# Altium PCB board_2.PcbDoc (part 3 of 4)
Units mm, origin at the board's own origin, x right, y up, seen from the top; angles counter-clockwise.
Board outline 144.25 x 129 mm, 8 copper layers (Top Layer, PWR, Layer2, Layer3, Layer4, Layer5, GND, Bottom Layer); 112 components, 273 nets, 1028 pads, 798 vias.
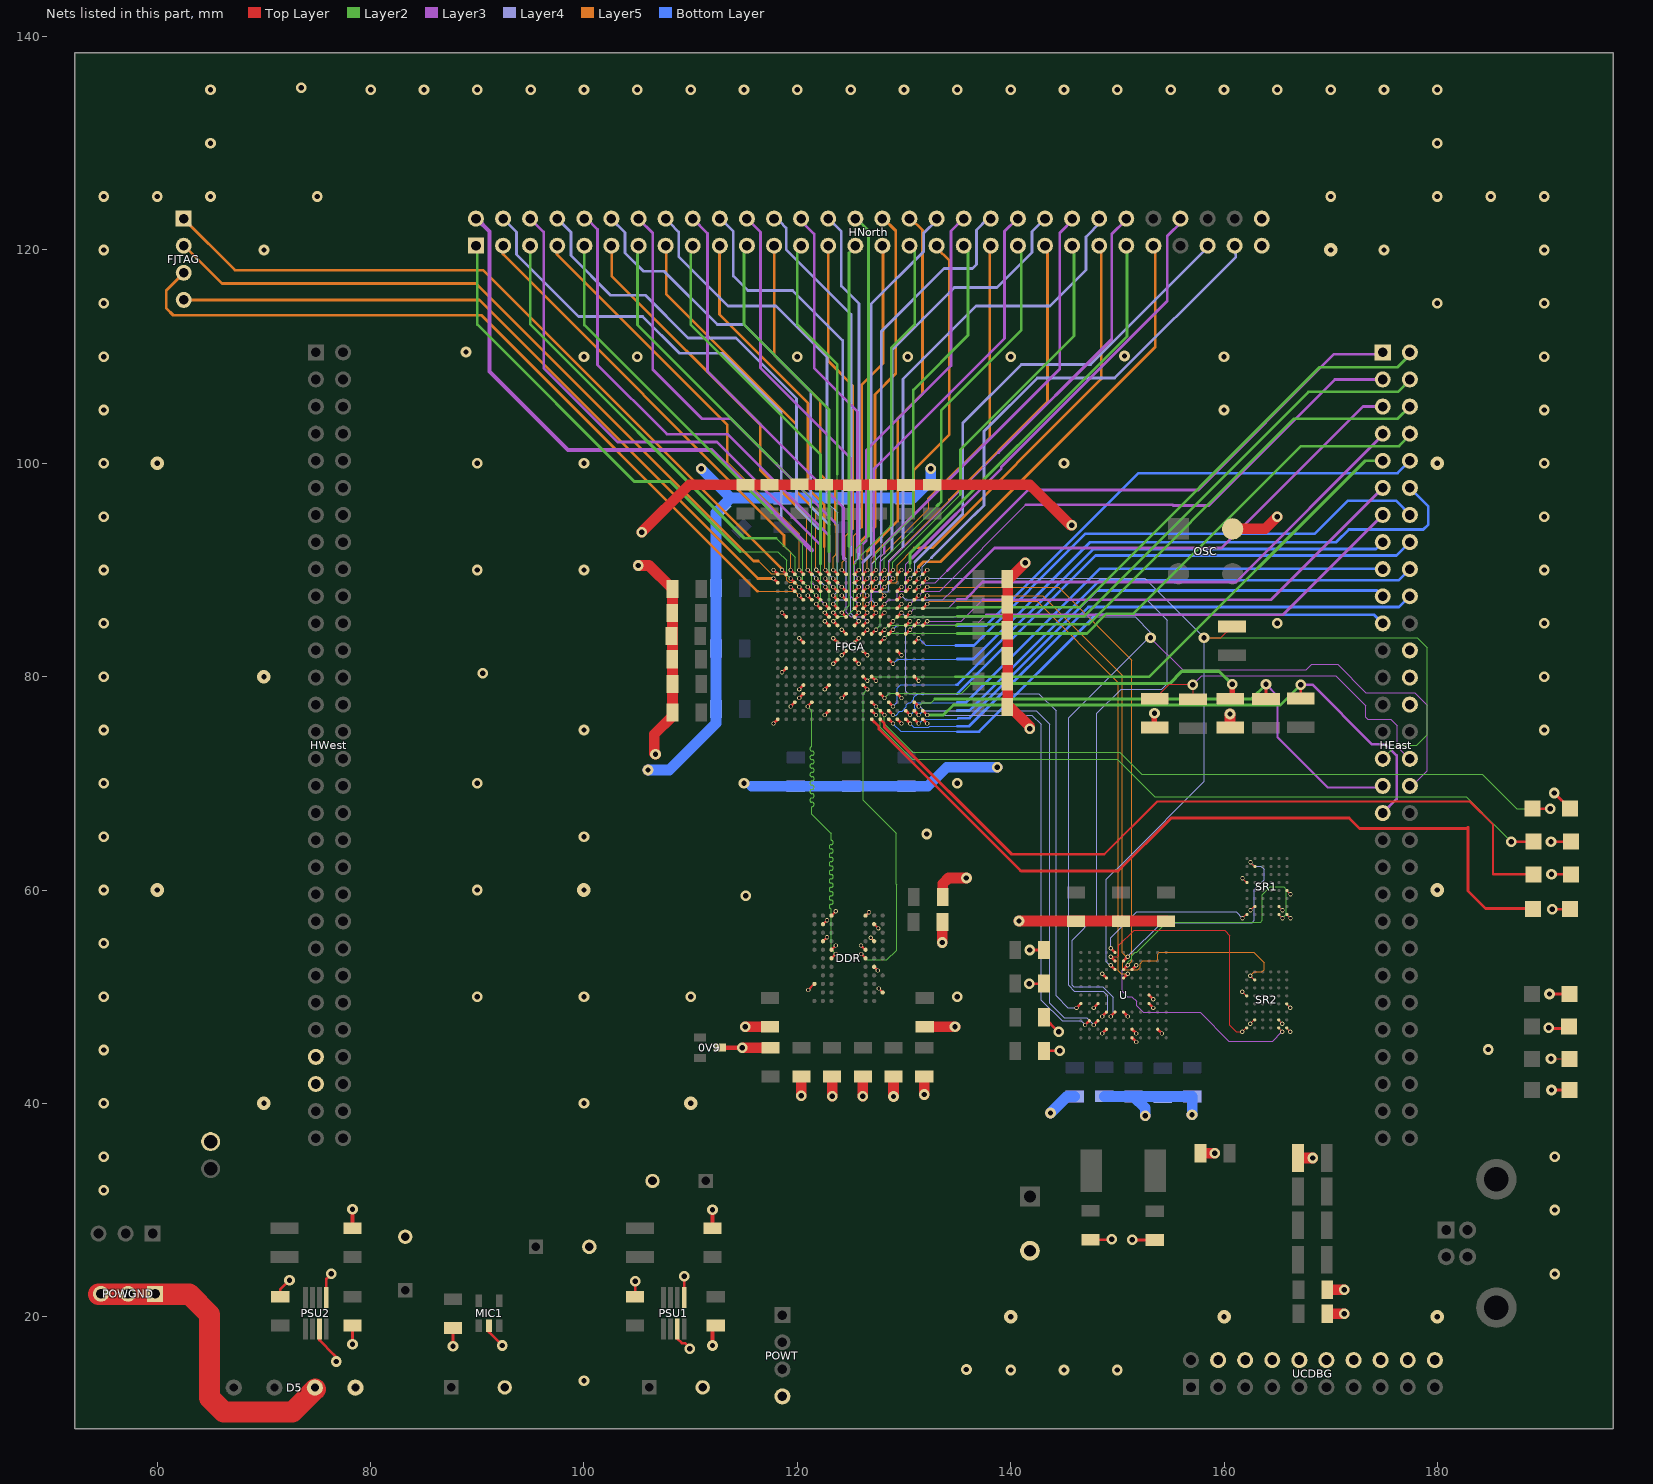
[diagram p9: the nets of this part, all layers, seen from the top]

## Via types
v1: diameter 0.4, hole 0.25, Top Layer to Bottom Layer, tented top, 553 vias
v2: diameter 1, hole 0.5, Top Layer to Bottom Layer, 222 vias
v3: diameter 1.27, hole 0.5, Top Layer to Bottom Layer, 12 vias
v4: diameter 0.4, hole 0.25, Top Layer to Bottom Layer, 7 vias
v5: diameter 7, hole 5, Top Layer to Bottom Layer, 4 vias

## Nets (pads, with @x,y where several pads share a name; then routed paths per layer and width w, separated by ;. In a path a pad name is that pad's centre, name@x,y a point inside that pad or via, vN(x,y) a via of type N, cw(c..) or ccw(c..) an arc to the next point about the centre after c; other vN are vias at no path point) (continued)
DDR2.DDR_RASN: DDR.F7 FPGA.L5 | length 30.9
  Top Layer w0.2: v1(126,54) DDR.F7@126.4,53.6
  Top Layer w0.254: FPGA.L5@126.168,79.204 v1(126.568,78.804)
  Layer2 w0.1: v1(126,54) 126.525,53.475 128.4,53.475 129.3,54.375 129.3,60.5 ; v1(126.568,78.804) 126.175,78.411 126.175,68.425 129.275,65.325 129.275,60.55 129.325,60.5
DDR2.DDR_WE: DDR.F3 FPGA.E3 | length 32.3
  Top Layer w0.2: DDR.F3@123.2,53.6 v1(123.6,54)
  Top Layer w0.254: v1(120.968,77.204) FPGA.E3@121.368,77.604
  Layer2 w0.1: v1@121,77.175 121.375,76.8 121.375,73.425 ccw(c121.375,73.225) 121.375,73.025 cw(c121.375,72.825) 121.375,72.625 ccw(c121.375,72.425) 121.375,72.225 cw(c121.375,72.025) 121.375,71.825 ccw(c121.375,71.625) 121.375,71.425 cw(c121.375,71.225) 121.375,71.025 ccw(c121.375,70.825) 121.375,70.625 cw(c121.375,70.425) 121.375,70.225 ccw(c121.375,70.025) 121.375,69.825 cw(c121.375,69.625) 121.375,69.425 ccw(c121.375,69.225) 121.375,69.025 cw(c121.375,68.825) 121.375,68.625 ccw(c121.375,68.425) 121.375,68.225 cw(c121.375,68.025) 121.375,67.825 121.375,67.1 123.15,65.325 ; 123.125,65.35 123.175,65.3 123.175,64.65 cw(c123.175,64.45) 123.175,64.25 ccw(c123.175,64.05) 123.175,63.85 cw(c123.175,63.65) 123.175,63.45 ccw(c123.175,63.25) 123.175,63.05 cw(c123.175,62.85) 123.175,62.65 ccw(c123.175,62.45) 123.175,62.25 cw(c123.175,62.05) 123.175,61.85 ccw(c123.175,61.65) 123.175,61.45 cw(c123.175,61.25) 123.175,61.05 ccw(c123.175,60.85) 123.175,60.65 cw(c123.175,60.45) 123.175,60.25 ccw(c123.175,60.05) 123.175,59.85 cw(c123.175,59.65) 123.175,59.45 ccw(c123.175,59.25) 123.175,59.05 cw(c123.175,58.85) 123.175,58.65 ccw(c123.175,58.45) 123.175,58.25 123.175,54.425 v1(123.6,54)
DDR_RZQ: FPGA.N4 R5.2 | length 36.1
  Top Layer w0.254: FPGA.N4@127.768,78.404 v1(128.168,78.004)
  Top Layer w0.5: R5.2@160.575,77.925 160.775,78.125 v2(160.775,79.275)
  Layer2 w0.1: v1@128.175,78 128.625,78.45 135.4,78.45 136.3,79.35
  Layer2 w0.254: 136.3,79.35 154.9,79.35
  Layer2 w0.3: 154.9,79.35 156.05,80.5 159.525,80.5 v2@160.75,79.275
EBI.READ: FPGA.V16 SR1.A2 SR2.A2 U.C6 | length 95.8
  Top Layer w0.1: SR2.A2@165.075,47.1 v1(165.45,46.725) ; SR1.A2@165.1,57.725 v1(165.475,57.35)
  Top Layer w0.254: FPGA.V16@131.768,88.004 v1(132.168,88.404) ; U.C6@150.575,52.55 v1(150.975,52.95)
  Layer3 w0.1: v1@151,52.95 150.925,52.95 150.45,52.475 150.45,50.5 150.944,50.006 151.369,50.006 151.8,49.575 151.8,49.15 152.425,48.525 157.75,48.525 160.45,45.825 164.55,45.825 165.425,46.7 v1@165.425,46.725
  Layer2 w0.1: v1(150.975,52.95) 150.975,53.225 151.325,53.575 151.325,53.825 151.675,54.175 151.825,54.175 154.625,56.975 163.425,56.975 163.6,57.15 163.6,59.575 164.325,60.3 165.575,60.3 165.85,60.025 165.85,57.725 v1(165.475,57.35)
  Layer5 w0.1: v1@132.15,88.386 144.489,88.386 151.35,81.525 151.35,53.325 v1(150.975,52.95)
EBI.SELECT0: FPGA.V14 U.D6 | length 50.3
  Top Layer w0.254: FPGA.V14@131.768,86.404 v1(132.168,86.804) ; U.D6@150.575,51.75 v1(150.975,52.15)
  Layer5 w0.1: v1(132.168,86.804) 132.414,87.05 142.475,87.05 150.1,79.425 150.1,52.425 150.375,52.15 v1(150.975,52.15)
EBI.SELECT1: SR1.A6 U.A5 | length 15.7
  Top Layer w0.1: v1(161.725,57.35) SR1.A6@162.1,57.725
  Top Layer w0.254: v1(149.375,54.55) U.A5@149.775,54.15
  Layer4 w0.1: v1@149.4,54.5 149.4,55.525 151.825,57.95 161.125,57.95 v1(161.725,57.35)
EBI.SELECT2: SR2.A6 U.B5 | length 23.8
  Top Layer w0.1: v1(149.375,53.75) 150.025,53.75 150.15,53.875 150.15,54.8 151.575,56.225 160.05,56.225 160.55,55.725 160.55,47.3 161.125,46.725 v1@161.675,46.725 ; v1(161.7,46.725) SR2.A6@162.075,47.1
  Top Layer w0.254: v1(149.375,53.75) U.B5@149.775,53.35
EBI.WRITE: FPGA.V15 SR1.G5 SR2.G5 U.B6 | length 88.6
  Top Layer w0.1: v1(162.45,51.975) SR2.G5@162.825,51.6 ; v1(162.475,62.6) SR1.G5@162.85,62.225
  Top Layer w0.254: FPGA.V15@131.768,87.204 v1(132.168,87.604) ; U.B6@150.575,53.35 v1(150.975,53.75)
  Layer5 w0.1: v1(132.168,87.604) 142.996,87.604 150.475,80.125 150.475,54.1 150.825,53.75 v1(150.975,53.75) 150.525,53.3 150.525,52.675 150.675,52.525 151.925,52.525 152.15,52.75 152.15,53.1 152.4,53.35 153.675,53.35 153.775,53.45 153.775,54 153.925,54.15 162.8,54.15 163.775,53.175 163.775,52.525 163.6,52.35 162.825,52.35 v1(162.45,51.975)
  Layer4 w0.1: v1(150.975,53.75) 150.975,53.775 154.15,56.95 162.625,56.95 162.825,57.15 162.825,60.025 163.75,60.95 163.75,61.95 163.45,62.25 162.825,62.25 v1(162.475,62.6)
FJTAG_TCK: FJTAG.4 FPGA.A17 | length 66.8
  Top Layer w0.254: v1(117.768,89.204) FPGA.A17@118.168,88.804
  Layer5 w0.254: FJTAG.4@62.35,115.3 90.2,115.3 116.296,89.204 v1(117.768,89.204)
FJTAG_TDI: FJTAG.3 FPGA.D15 | length 75
  Top Layer w0.254: v1(120.168,87.604) FPGA.D15@120.568,87.204
  Layer5 w0.1: 116.275,88 119.772,88 v1(120.168,87.604)
  Layer5 w0.254: FJTAG.3@62.484,117.856 60.85,116.222 60.85,114.525 61.5,113.875 90.4,113.875 116.275,88
FJTAG_TDO: FJTAG.2 FPGA.D16 | length 71.6
  Top Layer w0.254: v1(120.168,88.404) FPGA.D16@120.568,88.004
  Layer5 w0.1: 116.35,90.85 117.55,89.65 118.7,89.65 119.018,89.332 119.018,89.059 119.223,88.854 119.718,88.854 v1(120.168,88.404)
  Layer5 w0.254: FJTAG.2@62.525,120.4 66.075,116.85 89.9,116.85 115.9,90.85 116.35,90.85
FJTAG_TMS: FJTAG.1 FPGA.B18 | length 70.3
  Top Layer w0.254: v1(118.568,90.004) FPGA.B18@118.968,89.604
  Layer5 w0.254: FJTAG.1@62.484,122.936 62.484,122.891 67.275,118.1 90.556,118.1 v1@118.575,90.081
FLED0: F0.1 FPGA.N2 | length 68.8
  Top Layer w0.254: FPGA.N2@127.768,76.804 v1(128.168,76.404) ; F0.1@188.925,67.625 v2(190.575,67.625)
  Layer2 w0.1: v1(128.168,76.404) 128.168,75.582 130.825,72.925 ; 130.8,72.925 130.825,72.925 ; v2(190.575,67.625) 187.425,67.625 184.2,70.85 152.275,70.85 150.2,72.925 130.825,72.925
FLED1: F1.1 FPGA.N1 | length 74.2
  Top Layer w0.2: 140.1,63.35 148.775,63.35 153.725,68.3 183.05,68.3 185.225,66.125 185.225,61.575
  Top Layer w0.254: FPGA.N1@127.768,76.004 128.161,75.611 ; 128.15,75.6 128.15,75.3 140.1,63.35 ; 185.225,61.475 F1.1@189,61.475
FLED2: F2.1 FPGA.M3 | length 68.7
  Top Layer w0.254: FPGA.M3@127.011,77.561 v1(127.368,77.204) ; v2(186.925,64.525) F2.1@189,64.525
  Layer2 w0.1: v1(127.368,77.204) 127.775,76.797 127.775,75.25 130.762,72.262 149.988,72.262 153.525,68.725 182.725,68.725 v2@187,64.45
  Layer2 w0.254: v2@186.8,64.7 v2@187,64.5
FLED3: F3.1 FPGA.M1 | length 76.9
  Top Layer w0.254: FPGA.M1@126.968,76.004 127.642,75.33 127.642,75.09 140.907,61.825 ; 141,61.775 150.075,61.775 155.05,66.75 171.725,66.75 172.7,65.775 182.775,65.775 182.875,65.875 182.875,59.9 184.5,58.275 F3.1@188.825,58.275
FPGA_CCLK: FPGA.R15 HEast.32 R9.2 R10.2 U.H5 | length 107.3
  Top Layer w0.1: R9.2@153.425,77.925 R9.2@153.425,78.225 ; R9.2@153.5,77.925 154.85,79.275 v2@157.025,79.275 ; v2@157.05,79.25 157.1,79.2 R10.2@157.1,77.875
  Top Layer w0.254: FPGA.R15@129.368,87.204 v1(129.768,87.604) ; v1(149.375,48.15) U.H5@149.775,48.55
  Layer3 w0.1: v2(157.075,79.25) 157.9,80.075 170.45,80.075 173.275,77.25 173.275,76.2 173.475,76 175.625,76 176.25,75.375 176.25,73.425 HEast.32@177.4,72.275
  Layer4 w0.1: v1(129.768,87.604) 130.172,87.2 152.775,87.2 154.675,85.3 154.675,79.3 ; 148.05,76.525 148.075,76.55 ; v1@149.321,48.15 149.6,48.429 149.6,49.95 148.625,50.925 145.9,50.925 145.75,51.075 145.75,55.3 148.075,57.625 148.075,76.55 ; v2@157.025,79.3 154.65,79.3 154.175,78.825 150.35,78.825 148.075,76.55 ; v2@157.125,79.3 v2@157.15,79.275
FPGA_DIN: FPGA.R13 HEast.34 U.H4 | length 105
  Top Layer w0.254: FPGA.R13@129.368,85.604 v1(129.768,86.004) ; v1(148.575,48.15) U.H4@148.975,48.55
  Layer3 w0.1: v2(153.1,83.65) 156.125,80.625 167.7,80.625 168.225,81.15 170.65,81.15 173.3,78.5 177.875,78.5 179.05,77.325 179.05,71.175 177.625,69.75 HEast.34@177.425,69.75
  Layer4 w0.1: v1(129.768,86.004) 130.172,85.6 151.675,85.6 153.1,84.175 v2@153.1,83.8 ; v1(148.575,48.15) 149.1,48.675 149.1,50.1 148.675,50.525 145.975,50.525 145.45,51.05 145.45,76.15 152.95,83.65 v2(153.1,83.65)
FPGA_DONE: FPGA.V17 HEast.31 R6.2 U.C5 | length 101.7
  Top Layer w0.1: v2@158.1,83.65 158.125,83.625 159.675,83.625 R6.2@160.75,84.7
  Top Layer w0.254: FPGA.V17@131.768,88.804 v1(132.168,89.204) ; v1(149.375,52.95) U.C5@149.775,52.55
  Layer2 w0.1: v2(158.125,83.65) 178.125,83.65 179.05,82.725 179.05,74.575 178.05,73.575 176.125,73.575 HEast.31@174.85,72.3
  Layer4 w0.1: v1(132.168,89.204) 152.571,89.204 v2(158.125,83.65) 158.125,70.175 150.95,63 ; v1@149.299,52.95 148.975,53.274 148.975,61.024 150.95,62.999 ; 150.95,62.975 150.95,63
FPGA_INIT_B: FPGA.U3 HEast.33 R8.2 U.J3 | length 97.4
  Top Layer w0.254: FPGA.U3@130.968,77.604 v1@131.347,77.225 ; v1(147.775,47.35) U.J3@148.175,47.75 ; R8.2@163.925,77.9 v2(163.925,79.275)
  Layer3 w0.2: v2(163.925,79.275) 165.025,78.175 165.025,74.3 169.7,69.625 HEast.33@174.85,69.625
  Layer2 w0.1: v1@131.35,77.225 131.7,77.575 132.55,77.575 132.875,77.9
  Layer2 w0.254: 132.875,77.9 162.55,77.9 v2(163.925,79.275)
  Layer4 w0.1: v1(131.368,77.204) 131.496,77.204 131.875,76.825 142.375,76.825 143.65,75.55 143.65,49.4 145.025,48.025 147.125,48.025 v1@147.8,47.35
  Layer4 w0.254: HEast.33@174.8,69.8 HEast.33@174.9,69.7
FPGA_PROG_B: FPGA.V2 HEast.35 R7.2 U.J2 | length 98.3
  Top Layer w0.254: FPGA.V2@131.768,76.804 v1(132.168,76.404) ; v1(146.975,47.35) U.J2@147.375,47.75 ; R7.2@167.2,77.95 v2(167.2,79.25)
  Layer3 w0.254: v2@167.225,79.25 168.275,79.25 173.875,73.65 175.15,73.65 176.175,72.625 176.175,68.515 HEast.35@174.876,67.216
  Layer2 w0.254: v1(132.168,76.404) 133.679,76.404 134.625,77.35 165.3,77.35 v2(167.2,79.25)
  Layer4 w0.1: v1(132.168,76.404) 141.996,76.404 142.875,75.525 142.875,49.675 144.825,47.725 146.6,47.725 v1(146.975,47.35) ; HEast.35@174.8,67.216 HEast.35@174.876,67.216
FPGA_READY: FPGA.T12 U.G1 | length 52.1
  Top Layer w0.254: FPGA.T12@130.168,84.804 v1(130.568,85.204) ; v1(146.175,48.95) U.G1@146.575,49.35
  Layer3 w0.1: v1@146.075,48.95 v1(146.175,48.95)
  Layer4 w0.1: v1(130.568,85.204) 130.175,84.811 130.175,78.65 130.425,78.4 142.65,78.4 144.25,76.8 144.25,50.075 145.35,48.975 146.175,48.975 v1@146.225,48.925
  Bottom Layer w0.1: v1(146.175,48.95) v1@146.325,48.95
GND: 0V9.3 C1.1 C2.1 C3.1 C4.1 C5.1 C6.1 C7.1 C8.1 C9.1 C10.1 C11.1 C12.1 C13.1 C14.1 C15.1 C16.1 C17.1 C18.1 C19.1 C20.1 C21.1 C22.1 C23.1 C24.1 C25.1 C26.1 C27.1 C28.1 C29.1 C30.1 C31.1 C32.1 C33.1 C34.1 C35.1 C36.1 C37.1 C38.2 C39.2 C40.2 C41.2 C42.2 C43.1 C44.1 C45.1 C46.1 C47.1 C48.1 C49.1 C50.1 C51.1 C52.1 C53.2 C54.1 C55.1 C56.1 C57.1 C58.1 C59.1 C60.1 C61.1 C62.1 C63.1 C64.1 D1.2 D5.4 DDR.A3 DDR.A7 DDR.B2 DDR.B8 DDR.D2 DDR.D8 DDR.E3 DDR.E7 DDR.G8 DDR.J1 DDR.K9 F0.2 F1.2 F2.2 F3.2 FPGA.A1 FPGA.A18 FPGA.B7 FPGA.B13 FPGA.C3 FPGA.C16 FPGA.D4 FPGA.D5 FPGA.D10 FPGA.E15 FPGA.G2 FPGA.G5 FPGA.G12 FPGA.G17 FPGA.H8 FPGA.H10 FPGA.J4 FPGA.J9 FPGA.J11 FPGA.J15 FPGA.K8 FPGA.K10 FPGA.L9 FPGA.L11 FPGA.M2 FPGA.M6 FPGA.M17 FPGA.N13 FPGA.R1 FPGA.R4 FPGA.R9 FPGA.R14 FPGA.R16 FPGA.R18 FPGA.T16 FPGA.U6 FPGA.U12 FPGA.V1 FPGA.V18 HEast.24 HEast.26 HEast.28 HNorth.59 HNorth.60 HWest.53 HWest.55 L1.1 MIC1.2 OSC.2 POWT.4 PSU1.3 PSU1.5 PSU2.3 PSU2.5 R5.1 R9.1 SR1.A1 SR1.B2 SR1.B5 SR1.D1 SR1.E6 SR2.A1 SR2.B2 SR2.B5 SR2.D1 SR2.E6 U0.2 U1.2 U2.2 U3.2 U.C7 U.D4 U.F9 U.G3 U.G9 U.H6 U.K4 U.K7 U.K10 U.L7 U_RESET.2 UCDBG.4 UCDBG.6 UCDBG.8 UCDBG.10 UCDBG.12 UCDBG.14 UCDBG.16 UCDBG.18 UCDBG.20 UD.1 VI.2 VO.2 XC1.2 XC2.2 | length 315.9
  Top Layer w0.1: v1(161.7,50.475) SR2.E6@162.075,50.1 ; v1(161.725,61.1) SR1.E6@162.1,60.725 ; v1(162.45,47.475) SR2.B5@162.825,47.85 ; v1(162.475,58.1) SR1.B5@162.85,58.475 ; SR2.B2@165.075,47.85 v1(165.45,47.475) ; SR1.B2@165.1,58.475 v1(165.475,58.1) ; SR2.A1@165.825,47.1 v1(166.2,46.725) ; SR2.D1@165.825,49.35 v1(166.2,48.975) ; SR1.A1@165.85,57.725 v1(166.225,57.35) ; SR1.D1@165.85,59.975 v1(166.225,59.6) ; v2(190.65,44.175) 192.325,44.175 U2.2@192.35,44.2
  Top Layer w0.2: v1(121.025,50.625) DDR.J1@121.6,51.2 ; DDR.D2@122.4,55.2 v1(122.775,55.575) ; DDR.B2@122.4,56.8 v1(122.775,57.175) ; DDR.E3@123.2,54.4 v1(123.6,54.8) ; DDR.A3@123.2,57.6 v1(123.6,58) ; v1(125.975,54.8) DDR.E7@126.425,54.35 ; DDR.A7@126.4,57.6 v1(126.725,57.925) ; v1(126.875,55.525) DDR.D8@127.2,55.2 ; DDR.G8@127.2,52.8 v1(127.55,52.45) ; DDR.B8@127.2,56.8 v1(127.6,56.4) ; v1(127.625,50.775) DDR.K9@128,50.4
  Top Layer w0.254: C5.1@71.525,21.875 71.525,22.55 v2(72.4,23.425) ; PSU2.3@75.2,19.125 75.2,17.8 76.575,16.425 76.775,16.225 v2(76.775,15.8) ; PSU2.5@75.85,21.525 75.85,23.55 v2(76.325,24.025) ; v2(78.3,17.425) C4.1@78.3,19.175 ; v2(87.725,17.225) C7.1@87.725,18.95 ; MIC1.2@91.1,19.15 91.1,18.55 v2(92.35,17.3) ; C2.1@104.8,21.875 v2(104.8,23.325) ; PSU1.3@108.738,17.962 109.181,17.519 109.481,17.519 109.925,17.075 v2(109.925,17) ; PSU1.3@108.75,18.25 PSU1.3@108.75,19.125 ; PSU1.5@109.4,21.525 v2(109.4,23.8) ; v1(117.768,75.604) FPGA.A1@118.168,76.004 ; v1(117.768,90.004) FPGA.A18@118.168,89.604 ; v1(118.568,80.404) FPGA.B7@118.968,80.804 ; v1(118.568,86.004) FPGA.B13@118.968,85.604 ; v1(119.368,77.204) FPGA.C3@119.768,77.604 ; v1(119.368,88.404) FPGA.C16@119.768,88.004 ; v1(120.168,78.004) FPGA.D4@120.568,78.404 ; v1(120.168,78.804) FPGA.D5@120.568,79.204 ; v1(120.168,83.604) FPGA.D10@120.568,83.204 ; v1(120.968,87.604) FPGA.E15@121.368,87.204 ; v1(122.568,76.404) FPGA.G2@122.968,76.804 ; v1(122.568,78.804) FPGA.G5@122.968,79.204 ; v1(122.568,85.204) FPGA.G12@122.968,84.804 ; v1@122.568,89.204 FPGA.G17@122.968,88.804 ; v1(123.368,81.204) FPGA.H8@123.768,81.604 ; v1(123.368,83.604) FPGA.H10@123.768,83.204 ; v1(124.168,78.004) FPGA.J4@124.568,78.404 ; v1(124.168,82.004) FPGA.J9@124.568,82.404 ; v1(124.168,84.404) FPGA.J11@124.568,84.004 ; v1(124.168,87.604) FPGA.J15@124.568,87.204 ; FPGA.K8@125.368,81.604 v1(125.768,81.204) ; FPGA.K10@125.368,83.204 v1(125.768,83.604) ; FPGA.L9@126.168,82.404 v1(126.568,82.004) ; FPGA.L11@126.168,84.004 v1(126.568,84.404) ; FPGA.M2@126.968,76.804 v1(127.368,76.404) ; FPGA.M6@126.968,80.004 v1(127.368,79.604) ; FPGA.M17@126.968,88.804 v1(127.368,89.204) ; FPGA.N13@127.768,85.604 v1(128.168,86.004) ; FPGA.R1@129.368,76.004 v1(129.768,75.604) ; FPGA.R4@129.368,78.404 v1(129.768,78.004) ; FPGA.R9@129.368,82.404 v1(129.768,82.004) ; FPGA.R14@129.368,86.404 v1(129.768,86.804) ; FPGA.R16@129.368,88.004 v1(129.768,88.404) ; FPGA.R18@129.368,89.604 v1(129.768,90.004) ; FPGA.T16@130.168,88.004 v1(130.568,88.404) ; FPGA.U6@130.968,80.004 v1(131.368,79.604) ; FPGA.U12@130.968,84.804 v1(131.368,85.204) ; FPGA.V1@131.768,76.004 v1(132.168,75.604) ; FPGA.V18@131.768,89.604 v1(132.168,90.004) ; v2(141.75,51.225) C44.1@143.125,51.225 ; v2(141.8,54.375) C43.1@143.125,54.375 ; C46.1@143.125,44.925 v2(144.6,44.925) ; C45.1@143.125,48.075 v2(144.5,46.7) ; XC2.2@147.475,27.225 149.45,27.225 v2(149.475,27.25) ; v1(147.775,48.95) U.G3@148.175,49.35 ; v1(148.575,46.55) U.K4@148.975,46.95 ; v1(148.575,52.15) U.D4@148.975,51.75 ; U.H6@150.575,48.55 v1(150.975,48.15) ; U.L7@151.375,46.15 v1(151.775,45.75) ; U.K7@151.375,46.95 v1(151.775,46.55) ; U.C7@151.375,52.55 v1(151.775,52.95) ; v2(151.4,27.225) 151.425,27.2 XC1.2@153.5,27.2 ; U.G9@152.975,49.35 v1(153.375,48.95) ; U.F9@152.975,50.15 v1(153.375,49.75) ; U.K10@153.775,46.95 v1(154.175,46.55) ; v2(190.425,47.1) 190.225,47.1 190.15,47.025 U1.2@191.9,47.025 ; v2(190.5,50.25) U0.2@192.125,50.25 ; v2(190.65,64.525) F2.2@192.5,64.525 ; v2(190.697,41.247) U3.2@192.367,41.247 ; v2(190.7,61.475) F1.2@192.5,61.475 ; v2(190.775,58.2) F3.2@192.45,58.2 ; v2(190.95,69.1) F0.2@192.425,67.625
  Top Layer w0.4: C6.1@78.3,28.3 v2(78.3,30.075) ; v2(112.05,17.3) C1.1@112.05,19.175 ; C3.1@112.05,28.3 v2(112.05,30.025) ; 0V9.3@112.725,45.225 v2(114.85,45.225)
  Top Layer w0.5: R9.1@153.425,75.2 153.45,75.225 v2@153.45,76.575
  Top Layer w1: v2(105.1,90.425) 106.1,90.425 C30.1@108.3,88.225 C28.1@108.3,76.625 108.3,76.3 106.6,74.6 106.6,72.825 v2(106.7,72.725) ; v2(105.425,93.55) 109.875,98 C31.1@117.4,98 C35.1@122.483,98 C36.1@127.567,98 C37.1@132.65,98 141.8,98 145.6,94.2 v2(145.725,94.2) ; v2@115,45.225 C20.1@117.5,45.225 ; v2(115.125,47.175) C18.1@117.45,47.175 ; v2(120.38,40.705) C21.1@120.38,42.525 ; v2(123.26,40.66) C22.1@123.26,42.525 ; v2(126.14,40.665) C23.1@126.14,42.525 ; v2(129.02,40.645) C24.1@129.02,42.525 ; v2(131.9,40.825) C25.1@131.9,42.525 ; C19.1@131.95,47.175 v2(134.775,47.175) ; v2(133.6,55.075) C26.1@133.6,57 ; C27.1@133.625,59.35 133.625,60.575 134.175,61.125 v2(135.85,61.125) ; v2(140.775,57.1) C49.1@154.575,57.1 ; v2(141.375,90.675) 139.725,89.025 139.725,77.375 141.775,75.325 v2(141.775,75.125) ; UD.1@157.8,35.325 v2(159.125,35.325) ; R5.1@160.55,75.225 v2(160.55,76.5) ; OSC.2@160.805,93.85 163.85,93.85 v2(165,95) ; L1.1@166.925,34.875 v2(168.3,34.875) ; VI.2@169.675,20.275 v2(171.275,20.275) ; VO.2@169.675,22.525 v2(171.275,22.525)
  Layer2 w0.1: v1(165.45,47.475) v1@165.475,47.45
  Bottom Layer w1: v2(106,71.25) 108,71.25 112.375,75.625 C10.1@112.375,76.975 112.375,95.375 113.75,96.75 ; v2(111,99.5) 113.75,96.75 ; 115.725,69.725 C14.1@119.85,69.725 C15.1@125.05,69.725 C9.1@130.25,69.725 132.225,69.725 134,71.5 v2(138.75,71.5) ; v2(132.5,99.5) 132.5,98.375 130.875,96.75 113.75,96.75 ; v2(143.725,39.1) 145.275,40.65 C48.1@146,40.65 ; C63.1@148.775,40.65 C47.1@151.512,40.65 ; v2(152.6,38.85) 152.6,39.562 C47.1@151.512,40.65 ; v2(157,38.925) 157.025,38.95 C52.1@157.025,40.65 C47.1@151.512,40.65
  other v1: 122.631,89.204
  other v2: 100,14 140,15 145,15 150,15 135.85,15.05 191,24 191,30 55,31.85 55,35 191,35 55,40 100,40 55,45 184.775,45.05 55,50 90,50 100,50 110,50 135,50 55,55 115.175,59.45 55,60 90,60 55,65 100,65 132.125,65.25 55,70 90,70 115,70 135,70 55,75 100,75 190,75 153.475,76.575 55,80 190,80 90.525,80.325 55,85 165,85 190,85 55,90 90,90 100,90 190,90 55,95 190,95 55,100 90,100 100,100 145,100 190,100 55,105 160,105 190,105 55,110 100,110 105,110 120,110 130.35,110 140,110 160,110 190,110 150.675,110.05 88.95,110.425 55,115 180,115 190,115 55,120 70,120 175,120 190,120 55,125 60,125 65,125 75,125 170,125 180,125 185,125 190,125 65,130 180,130 65,135 80,135 85,135 90,135 95,135 100,135 105,135 110,135 115,135 120,135 125,135 130,135 135,135 140,135 145,135 150,135 155,135 160,135 165,135 170,135 175,135 180,135 73.5,135.2
  other v3: 140,20 160,20 180,20 70,40 110,40 60,60 100,60 180,60 70,80 60,100 180,100 170,120
GND_AC: D5.3 POWGND.1 POWGND.2 POWGND.3 | length 30.3
  Top Layer w2: POWGND.3@54.5,22.1 63.013,22.1 64.9,20.213 64.9,12.4 66.229,11.071 72.671,11.071 D5.3@74.8,13.2
HE2: FPGA.P8 HEast.12 | length 60.3
  Top Layer w0.254: FPGA.P8@128.568,81.604 v1(128.968,81.204)
  Bottom Layer w0.1: v1(128.968,81.204) 129.414,81.65 135,81.65
  Bottom Layer w0.254: 135,81.65 136.5,81.65 147.45,92.6 170.5,92.6 171.7,93.8 178.675,93.8 179.15,94.275 179.15,95.962 HEast.12@177.416,97.696
HE3: FPGA.U10 HEast.14 | length 53.1
  Top Layer w0.254: FPGA.U10@130.968,83.204 v1(131.368,83.604)
  Bottom Layer w0.1: v1(131.368,83.604) 132.047,82.925 134.825,82.925
  Bottom Layer w0.254: 134.825,82.925 136.55,82.925 147.025,93.4 168.513,93.4 171.588,96.475 176.15,96.475 HEast.14@177.45,95.175
HE4: FPGA.P11 HEast.10 | length 55.6
  Top Layer w0.254: FPGA.P11@128.568,84.004 v1(128.968,84.404)
  Bottom Layer w0.1: v1(128.968,84.404) 129.364,84.8 135,84.8
  Bottom Layer w0.254: 135,84.8 137.7,84.8 151.97,99.07 176.25,99.07 HEast.10@177.416,100.236
HE5: FPGA.N10 HEast.8 | length 57.9
  Top Layer w0.254: FPGA.N10@127.768,83.204 v1(128.168,83.604)
  Layer2 w0.1: v1(128.168,83.604) 128.614,84.05 135,84.05
  Layer2 w0.254: 135,84.05 147.15,84.05 149,85.9 151.525,85.9 167.225,101.6 176.4,101.6 HEast.8@177.6,102.8
HE6: FPGA.V12 HEast.11 | length 48.4
  Top Layer w0.254: FPGA.V12@131.768,84.804 v1(132.168,85.204)
  Layer3 w0.1: v1(132.168,85.204) 135.379,85.204 137.375,87.2
  Layer3 w0.254: 137.4,87.2 164.38,87.2 HEast.11@174.876,97.696
HE7: FPGA.T11 HEast.13 | length 49.3
  Top Layer w0.254: FPGA.T11@130.168,84.004 v1(130.568,84.404)
  Layer3 w0.1: v1(130.568,84.404) 131.014,84.85 136.775,84.85 137.725,85.8
  Layer3 w0.254: 137.725,85.8 165.52,85.8 HEast.13@174.876,95.156
HE8: FPGA.N11 HEast.6 | length 58.5
  Top Layer w0.254: FPGA.N11@127.768,84.004 v1(128.168,84.404)
  Layer2 w0.1: v1(128.168,84.404) 128.589,84.825 134.9,84.825
  Layer2 w0.254: 134.9,84.8 135.008,84.908 147.29,84.908 166.567,104.185 176.285,104.185 HEast.6@177.416,105.316
HE9: FPGA.M11 HEast.2 | length 62.2
  Top Layer w0.254: FPGA.M11@126.968,84.004 v1(127.368,84.404)
  Layer2 w0.1: v1(127.368,84.404) 127.775,84.811 127.775,86.2 128.025,86.45 135,86.45
  Layer2 w0.254: 135,86.45 135.05,86.5 146.45,86.5 168.95,109 176.25,109 HEast.2@177.5,110.25
HE10: FPGA.P12 HEast.4 | length 58.5
  Top Layer w0.254: FPGA.P12@128.568,84.804 v1(128.968,85.204)
  Layer2 w0.1: v1(128.968,85.204) 129.368,85.604 134.679,85.604 134.725,85.65 135,85.65
  Layer2 w0.254: 135,85.65 146.875,85.65 167.925,106.7 176.3,106.7 HEast.4@177.5,107.9
HE11: FPGA.T14 HEast.5 | length 52.5
  Top Layer w0.254: FPGA.T14@130.168,86.404 v1(130.568,86.804)
  Layer3 w0.1: v1(130.568,86.804) 130.964,87.2 133.641,87.2 134.602,88.16
  Layer3 w0.254: 134.602,88.16 138.491,92.05 159.75,92.05 173.016,105.316 HEast.5@174.876,105.316
HE12: FPGA.U15 HEast.3 | length 52.5
  Top Layer w0.254: FPGA.U15@130.968,87.204 v1(131.368,87.604)
  Layer3 w0.1: v1(131.368,87.604) 131.789,88.025 133.34,88.025 141.415,96.1
  Layer3 w0.254: 141.415,96.1 155.168,96.1 155.218,96.05 158.575,96.05 170.381,107.856 HEast.3@174.876,107.856
HE13: FPGA.T13 HEast.7 | length 51.9
  Top Layer w0.254: FPGA.T13@130.168,85.604 v1(130.568,86.004)
  Layer3 w0.1: v1(130.568,86.004) 131.014,86.45 134.2,86.45 135,87.25
  Layer3 w0.254: 135,87.25 135.75,87.25 137.375,88.875 161.1,88.875 174.876,102.651 HEast.7@174.876,102.776
HE14: FPGA.U16 HEast.1 | length 53.3
  Top Layer w0.254: FPGA.U16@130.968,88.004 v1(131.368,88.404)
  Layer3 w0.1: v1(131.368,88.404) 131.764,88.8 132.935,88.8 134.085,89.95
  Layer3 w0.254: 134.085,89.95 141.635,97.5 157.6,97.5 170.325,110.225 HEast.1@175.1,110.225
HE15: FPGA.P3 HEast.15 | length 53.6
  Top Layer w0.254: FPGA.P3@128.568,77.604 v1(128.968,77.204)
  Bottom Layer w0.1: v1(128.968,77.204) 129.368,77.604 129.368,78.918 129.7,79.25 134.925,79.25
  Bottom Layer w0.254: 134.925,79.25 135.034,79.25 147.759,91.975 174.235,91.975 HEast.15@174.822,92.562
HE16: FPGA.L6 HEast.9 | length 57.4
  Top Layer w0.254: FPGA.L6@126.168,80.004 v1(126.568,79.604)
  Layer2 w0.1: v1(126.568,79.604) 126.964,80 134.8,80
  Layer2 w0.254: 134.8,80 153,80 173.236,100.236 HEast.9@174.876,100.236
HE17: FPGA.U2 HEast.18 | length 52.3
  Top Layer w0.254: FPGA.U2@130.968,76.804 v1(131.368,76.404)
  Bottom Layer w0.1: v1(131.368,76.404) 131.789,76.825 135,76.825
  Bottom Layer w0.254: 135,76.825 136.14,76.825 148.34,89.025 176.365,89.025 HEast.18@177.416,90.076
HE18: FPGA.U1 HEast.19 | length 49.4
  Top Layer w0.254: FPGA.U1@130.968,76.004 v1(131.368,75.604)
  Bottom Layer w0.1: v1(131.368,75.604) 131.789,76.025 135.082,76.025
  Bottom Layer w0.254: 135.082,76.107 136.14,76.107 148.108,88.075 174.337,88.075 HEast.19@174.876,87.536
HE19: FPGA.T2 HEast.17 | length 51
  Top Layer w0.254: FPGA.T2@130.168,76.804 v1(130.568,76.404)
  Bottom Layer w0.1: v1(130.568,76.404) 131.12,76.957 131.018,77.059 131.018,77.349 131.223,77.554 131.513,77.554 131.615,77.451 131.739,77.575 135,77.575
  Bottom Layer w0.254: 135,77.575 135.825,77.575 148.375,90.125 174.827,90.125 HEast.17@174.876,90.076
HE20: FPGA.T1 HEast.20 | length 52.6
  Top Layer w0.254: FPGA.T1@130.168,76.004 v1(130.572,75.6)
  Bottom Layer w0.1: v1(130.572,75.6) 130.922,75.25 132.309,75.25 132.409,75.35 135,75.35
  Bottom Layer w0.254: 135,75.35 136.102,75.35 147.277,86.525 176.405,86.525 HEast.20@177.416,87.536
HE21: FPGA.P2 HEast.16 | length 56
  Top Layer w0.254: FPGA.P2@128.568,76.804 v1(128.968,76.404)
  Bottom Layer w0.1: v1(128.968,76.404) 129.273,76.404 129.623,76.754 129.813,76.754 130.218,77.159 130.218,77.349 130.423,77.554 130.613,77.554 130.918,77.859 130.918,78.049 131.269,78.4 135,78.4
  Bottom Layer w0.254: 135,78.4 147.95,91.35 176.15,91.35 HEast.16@177.416,92.616
HE22: FPGA.P1 HEast.21 | length 51.6
  Top Layer w0.254: FPGA.P1@128.568,76.004 v1(128.968,75.604)
  Bottom Layer w0.1: v1(128.968,75.604) 129.676,74.896 135,74.896
  Bottom Layer w0.254: 135,74.842 137.041,74.842 147.999,85.8 174.072,85.8 HEast.21@174.876,84.996
HEADERS.HN0: FPGA.F15 HNorth.13 | length 40.2
  Top Layer w0.254: v1(121.768,87.604) FPGA.F15@122.168,87.204
  Layer2 w0.1: 118,100 121.35,96.65 121.35,91.521 121.352,91.519 121.352,90.151 121.352,88.02 v1(121.768,87.604)
  Layer2 w0.254: HNorth.13@105.025,120.325 105.025,112.975 118,100
HEADERS.HN1: FPGA.F16 HNorth.2 | length 56.1
  Top Layer w0.254: v1(121.768,88.404) FPGA.F16@122.168,88.004
  Layer3 w0.1: 121.35,91.85 121.35,88.822 v1(121.768,88.404)
  Layer3 w0.4: HNorth.2@89.95,122.925 91.15,121.725 91.15,108.6 98.5,101.25 111.95,101.25 121.35,91.85
HEADERS.HN2: FPGA.C17 HNorth.1 | length 48
  Top Layer w0.254: v1(119.368,89.204) FPGA.C17@119.768,88.804
  Layer2 w0.1: 114.65,91.725 118.175,91.725 119,90.9 119,89.572 v1(119.368,89.204)
  Layer2 w0.254: HNorth.1@89.85,120.325 90,120.175 90,113 104.713,98.287 108.088,98.287 114.65,91.725
HEADERS.HN3: FPGA.C18 HNorth.3 | length 42.1
  Top Layer w0.254: v1(119.368,90.004) FPGA.C18@119.768,89.604
  Layer5 w0.1: 118.75,92.275 119.368,91.657 v1(119.368,90.004)
  Layer5 w0.254: HNorth.3@92.4,120.375 92.4,119.6 118.75,93.25 118.75,92.275
HEADERS.HN4: FPGA.F14 HNorth.17 | length 39.5
  Top Layer w0.254: v1(121.768,86.804) FPGA.F14@122.168,86.404
  Layer2 w0.1: v1(121.768,86.804) 122.175,87.211 122.175,90.55
  Layer2 w0.254: HNorth.17@110.25,120.375 110,120.125 110,113 122.175,100.825 122.175,90.55
HEADERS.HN5: FPGA.G14 HNorth.6 | length 53.5
  Top Layer w0.254: v1(122.568,86.804) FPGA.G14@122.968,86.404
  Layer3 w0.1: 122.2,92.275 122.2,87.172 v1(122.568,86.804)
  Layer3 w0.254: HNorth.6@95.05,122.85 96.225,121.675 96.225,108.925 103.15,102 112.475,102 122.2,92.275
HEADERS.HN6: FPGA.D17 HNorth.5 | length 44
  Top Layer w0.254: v1(120.168,89.204) FPGA.D17@120.568,88.804
  Layer2 w0.1: 118.025,92.975 119.8,91.2 119.8,90.7 ; 119.8,90.625 119.8,90.7 ; v1(120.168,89.204) 119.8,89.572 119.8,90.7
  Layer2 w0.254: HNorth.5@94.975,120.325 94.975,113.025 115.025,92.975 118.025,92.975
HEADERS.HN7: FPGA.D18 HNorth.7 | length 40.4
  Top Layer w0.254: v1(120.168,90.004) FPGA.D18@120.568,89.604
  Layer5 w0.1: 113.425,100.15 120.168,93.407 v1(120.168,90.004)
  Layer5 w0.254: HNorth.7@97.475,120.425 97.475,119.575 113.425,103.625 113.425,100.15
HEADERS.HN8: FPGA.H12 HNorth.30 | length 40.4
  Top Layer w0.254: v1(123.368,85.204) FPGA.H12@123.768,84.804
  Layer2 w0.1: v1(123.368,85.204) 123.429,85.204 123.875,85.65 124.625,85.65 125.275,86.3 125.275,90.45 125.5,90.675 125.5,91.975 126.675,93.15
  Layer2 w0.254: HNorth.30@125.675,122.8 126.675,121.8 126.675,93.15
HEADERS.HN9: FPGA.G13 HNorth.21 | length 38.5
  Top Layer w0.254: v1(122.568,86.004) FPGA.G13@122.968,85.604
  Layer2 w0.1: v1(122.568,86.004) 123,86.436 123,89.843 122.985,89.858 122.985,91.59
  Layer2 w0.254: HNorth.21@115.3,120.4 115,120.1 115,113 122.975,105.025 122.975,91.7
HEADERS.HN10: FPGA.E16 HNorth.9 | length 41.2
  Top Layer w0.254: v1(120.968,88.404) FPGA.E16@121.368,88.004
  Layer2 w0.1: 117.625,95.375 120.527,92.473 120.527,88.845 v1(120.968,88.404)
  Layer2 w0.254: HNorth.9@100.036,120.396 100.036,112.964 117.625,95.375
HEADERS.HN11: FPGA.E18 HNorth.11 | length 38.6
  Top Layer w0.254: v1(120.968,90.004) FPGA.E18@121.368,89.604
  Layer5 w0.1: 120.881,95.019 120.881,90.091 v1(120.968,90.004)
  Layer5 w0.254: HNorth.11@102.6,120.425 102.6,117.575 116.525,103.65 116.525,99.375 120.881,95.019
HEADERS.HN12: FPGA.K12 HNorth.24 | length 41.1
  Top Layer w0.254: FPGA.K12@125.368,84.804 v1(125.768,85.204)
  Layer4 w0.1: 125.075,91.375 125.025,91.325 125.025,85.947 v1(125.768,85.204)
  Layer4 w0.254: HNorth.24@118.375,122.65 118.95,122.075 118.95,120.05 125.05,113.95 125.05,91.4
HEADERS.HN13: FPGA.K13 HNorth.31 | length 36.6
  Top Layer w0.254: FPGA.K13@125.368,85.604 v1(125.768,86.004)
  Layer2 w0.254: HNorth.31@127.85,120.275 HNorth.31@128.075,120.275
  Layer5 w0.1: v1(125.768,86.004) 125.275,86.497 125.275,93.225 126.05,94
  Layer5 w0.254: 126.05,94 126.05,107.375 128.025,109.35 HNorth.31@128.025,120.5
HEADERS.HN14: FPGA.F17 HNorth.4 | length 52.3
  Top Layer w0.254: v1(121.768,89.204) FPGA.F17@122.168,88.804
  Layer4 w0.1: 119.85,93.35 121.35,91.85 121.35,89.622 v1(121.768,89.204)
  Layer4 w0.254: HNorth.4@92.416,122.936 93.675,121.677 93.675,119.575 99.5,113.75 105.5,113.75 108.937,110.312 112.937,110.312 118.5,104.75 118.5,94.7 119.85,93.35
HEADERS.HN15: FPGA.F18 HNorth.15 | length 36.7
  Top Layer w0.254: v1@121.768,90.004 FPGA.F18@122.168,89.604
  Layer5 w0.1: 121.706,95.594 121.706,90.094 v1(121.775,90.025)
  Layer5 w0.254: HNorth.15@107.7,120.35 107.7,115.875 119.928,103.647 119.928,97.372 121.706,95.594
HEADERS.HN16: FPGA.H13 HNorth.25 | length 36.8
  Top Layer w0.254: v1(123.368,86.004) FPGA.H13@123.768,85.604
  Layer2 w0.1: v1(123.368,86.004) 123.75,86.386 123.75,98.962
  Layer2 w0.254: HNorth.25@120.375,120.325 120,119.95 120,113 123.75,109.25 123.75,98.962
HEADERS.HN17: FPGA.H14 HNorth.20 | length 44.9
  Top Layer w0.254: v1(123.368,86.804) FPGA.H14@123.768,86.404
  Layer4 w0.1: v1@123.35,86.85 123.7,87.2 124.45,87.2 124.6,87.35 124.6,91.05 124.25,91.4
  Layer4 w0.254: HNorth.20@112.825,122.9 114,121.725 114,117.55 115.363,116.187 119.563,116.187 124.25,111.5 124.25,91.425
HEADERS.HN18: FPGA.H15 HNorth.16 | length 44.8
  Top Layer w0.254: v1(123.368,87.604) FPGA.H15@123.768,87.204
  Layer4 w0.1: 122.775,96.35 123.775,95.35 123.775,91.3 123.775,88.011 v1(123.368,87.604)
  Layer4 w0.254: HNorth.16@108.05,122.525 108.875,121.7 108.875,119.375 113.5,114.75 118,114.75 122.775,109.975 122.775,96.35
HEADERS.HN19: FPGA.H16 HNorth.10 | length 48.1
  Top Layer w0.254: v1(123.368,88.404) FPGA.H16@123.768,88.004
  Layer3 w0.1: 123,90.775 123,88.772 v1(123.368,88.404)
  Layer3 w0.254: HNorth.10@100.175,123.025 101.275,121.925 101.275,109.225 107.775,102.725 113.45,102.725 123,93.175 123,90.775
HEADERS.HN20: FPGA.G16 HNorth.8 | length 50.1
  Top Layer w0.254: v1@122.568,88.404 FPGA.G16@122.968,88.004
  Layer4 w0.1: 122.025,93.9 122.2,93.725 122.2,88.898 122.631,88.467 v1(122.631,88.404)
  Layer4 w0.254: HNorth.8@97.496,122.936 98.775,121.657 98.775,119.475 102.5,115.75 105.75,115.75 109.75,111.75 114.25,111.75 119.928,106.072 119.928,95.897 121.975,93.85
HEADERS.HN21: FPGA.G18 HNorth.19 | length 35.1
  Top Layer w0.254: v1@122.568,90.004 FPGA.G18@122.968,89.604 ; v1@122.568,90.004 v1(122.631,90.004)
  Layer5 w0.1: 122.568,92.25 122.568,90.067 v1(122.631,90.004)
  Layer5 w0.254: HNorth.19@112.7,120.325 112.7,113.95 120.999,105.651 120.999,97.629 122.528,96.1 122.528,92.172
HEADERS.HN22: FPGA.J13 HNorth.29 | length 35.5
  Top Layer w0.254: v1(124.168,86.004) FPGA.J13@124.568,85.604
  Layer2 w0.1: v1(124.168,86.004) 124.847,86.683 124.847,92.222
  Layer2 w0.254: 124.847,92.222 124.847,119.722 HNorth.29@125.525,120.4
HEADERS.HN23: FPGA.K14 HNorth.22 | length 41.2
  Top Layer w0.254: FPGA.K14@125.368,86.404 v1(125.768,86.804)
  Layer3 w0.1: 124.975,92.45 124.975,87.597 v1(125.768,86.804)
  Layer3 w0.254: HNorth.22@115.276,122.936 116.55,121.662 116.55,108.95 125,100.5 125,92.35
HEADERS.HN24: FPGA.L12 HNorth.18 | length 45.7
  Top Layer w0.254: FPGA.L12@126.168,84.804 v1(126.568,85.204)
  Layer3 w0.1: 124.325,91.025 124.6,90.75 124.6,86.05 125.025,85.625 126.147,85.625 v1(126.568,85.204)
  Layer3 w0.254: HNorth.18@110.196,122.936 111.573,121.559 111.573,108.602 124.325,95.85 124.325,91.025
HEADERS.HN25: FPGA.L13 HNorth.32 | length 39.6
  Top Layer w0.254: FPGA.L13@126.168,85.604 v1(126.568,86.004)
  Layer5 w0.1: 126,92.75 126,91.05 126.175,90.875 126.175,86.397 v1(126.568,86.004)
  Layer5 w0.254: 126,92.75 127.275,94.025 127.275,106.45 129.225,108.4 129.225,121.8 HNorth.32@128.025,123
HEADERS.HN26: FPGA.K15 HNorth.38 | length 40
  Top Layer w0.254: FPGA.K15@125.368,87.204 v1(125.768,87.604)
  Layer3 w0.1: v1@125.775,87.6 126.2,88.025 126.2,92.475
  Layer3 w0.254: 126.2,92.475 126.45,92.725 126.45,101.2 134.4,109.15 134.4,121.775 HNorth.38@135.6,122.975
HEADERS.HN27: FPGA.K16 HNorth.28 | length 36.6
  Top Layer w0.254: FPGA.K16@125.368,88.004 v1(125.768,88.404)
  Layer4 w0.1: v1(125.768,88.404) 125.4,88.772 125.4,90.725 125.775,91.1
  Layer4 w0.254: HNorth.28@122.896,122.936 124.125,121.707 124.125,116.625 125.775,114.975 125.775,91.1
HEADERS.HN28: FPGA.L15 HNorth.36 | length 38.9
  Top Layer w0.254: FPGA.L15@126.168,87.204 v1(126.568,87.604)
  Layer4 w0.1: 126.125,90.675 126.125,88.047 v1(126.568,87.604)
  Layer4 w0.254: 126.125,90.675 126.925,91.475 126.925,114.925 131.85,119.85 131.85,121.575 HNorth.36@133.1,122.825
HEADERS.HN29: FPGA.L16 HNorth.42 | length 40.8
  Top Layer w0.254: FPGA.L16@126.168,88.004 v1(126.568,88.404)
  Layer3 w0.1: v1(126.568,88.404) 126.95,88.786 126.95,91.1 ; 126.975,91.125 127.175,91.325 127.175,91.375
  Layer3 w0.254: 127.175,91.375 127.175,99.45 139.425,111.7 139.425,121.75 HNorth.42@140.575,122.9
HEADERS.HN30: FPGA.H17 HNorth.12 | length 45.5
  Top Layer w0.254: v1(123.368,89.204) FPGA.H17@123.768,88.804
  Layer4 w0.1: 123,94.225 123,89.572 v1(123.368,89.204)
  Layer4 w0.254: HNorth.12@102.558,122.917 103.85,121.625 103.85,119.725 105.575,118 107.5,118 112.5,113 115,113 121.25,106.75 121.25,95.975 123,94.225
HEADERS.HN31: FPGA.H18 HNorth.23 | length 33.5
  Top Layer w0.254: v1(123.368,90.004) FPGA.H18@123.768,89.604
  Layer5 w0.1: v1(123.368,90.004) 123.368,91.193 123.675,91.5
  Layer5 w0.254: HNorth.23@117.825,120.375 117.825,110.175 122.142,105.858 122.142,98.983 123.544,97.581 123.544,94.304 123.708,94.14 123.708,91.533 123.675,91.5
HEADERS.HN32: FPGA.J16 HNorth.14 | length 44.5
  Top Layer w0.254: v1(124.168,88.404) FPGA.J16@124.568,88.004
  Layer3 w0.1: 123.75,90.8 123.75,88.822 v1(124.168,88.404)
  Layer3 w0.254: HNorth.14@105.175,122.85 106.45,121.575 106.45,108.8 111.075,104.175 113.8,104.175 123.75,94.225 123.75,90.8
HEADERS.HN33: FPGA.J18 HNorth.27 | length 32.3
  Top Layer w0.254: v1(124.168,90.004) FPGA.J18@124.568,89.604
  Layer5 w0.1: v1(124.168,90.004) 124.229,90.065 124.229,90.728 124.493,90.992 124.493,93.168 125.2,93.875 125.175,93.875
  Layer5 w0.254: HNorth.27@122.9,120.35 122.9,109.575 125.175,107.3 125.175,93.875
HEADERS.HN34: FPGA.K17 HNorth.26 | length 36.7
  Top Layer w0.254: FPGA.K17@125.368,88.804 v1(125.768,89.204)
  Layer3 w0.1: 125.65,91.65 125.65,91.1 125.375,90.825 125.375,89.597 v1(125.768,89.204)
  Layer3 w0.254: HNorth.26@120.25,122.825 121.575,121.5 121.575,108.925 125.65,104.85 125.65,91.65
HEADERS.HN35: FPGA.K18 HNorth.33 | length 33.3
  Top Layer w0.254: FPGA.K18@125.368,89.604 v1(125.768,90.004)
  Layer2 w0.1: v1(125.768,90.004) 125.909,90.145 125.909,91.284 128.803,94.178
  Layer2 w0.254: 128.785,94.167 128.8,94.182 128.8,110.8 131,113 131,120.025 HNorth.33@130.6,120.425
HEADERS.HN36: FPGA.L17 HNorth.40 | length 40.7
  Top Layer w0.254: FPGA.L17@126.168,88.804 v1(126.568,89.204)
  Layer4 w0.1: v1(126.568,89.204) 127,89.636 127,90.575 127.875,91.45 127.875,92.625 ; 127.775,94.6 127.775,94.725
  Layer4 w0.254: 127.875,92.625 127.875,112.375 133.75,118.25 136.4,118.25 136.8,118.65 136.8,121.875 HNorth.40@137.85,122.925
  Bottom Layer w0.1: v1@126.575,89.2 v1@126.6,89.2
HEADERS.HN37: FPGA.L18 HNorth.34 | length 36
  Top Layer w0.254: FPGA.L18@126.168,89.604 v1(126.568,90.004)
  Layer5 w0.1: v1(126.568,90.004) 126.568,91.657 126.575,91.664
  Layer5 w0.254: 126.568,91.743 129.4,94.575 129.4,104.2 131.725,106.525 131.725,121.85 HNorth.34@130.625,122.95
HEADERS.HN38: FPGA.M16 HNorth.44 | length 44
  Top Layer w0.254: FPGA.M16@126.968,88.004 v1(127.368,88.404)
  Layer4 w0.1: v1(127.368,88.404) 127.775,88.811 127.775,90.75 128.875,91.85
  Layer4 w0.254: 128.875,91.85 128.875,110.625 134.719,116.469 138.719,116.469 142,119.75 142,121.72 HNorth.44@143.216,122.936
HEADERS.HN39: FPGA.M18 HNorth.37 | length 34.8
  Top Layer w0.254: FPGA.M18@126.968,89.604 v1(127.368,90.004)
  Layer2 w0.1: v1(127.368,90.004) 127.368,91.518 130.875,95.025
  Layer2 w0.254: 130.875,95.025 130.875,106.875 136,112 136,120.075 HNorth.37@135.575,120.5
HEADERS.HN40: FPGA.N17 HNorth.43 | length 38.2
  Top Layer w0.254: FPGA.N17@127.768,88.804 v1(128.168,89.204)
  Layer5 w0.1: v1(128.168,89.204) 128.6,89.636 128.6,90.895 134.25,96.545
  Layer5 w0.254: 134.25,96.545 134.25,96.575 143.45,105.775 HNorth.43@143.45,120.5
HEADERS.HN41: FPGA.N18 HNorth.41 | length 36.5
  Top Layer w0.254: FPGA.N18@127.768,89.604 v1(128.168,90.004)
  Layer2 w0.1: v1(128.168,90.004) 128.168,91.074 133.069,95.975
  Layer2 w0.254: 133.069,95.975 133.5,96.406 133.5,104.975 141,112.475 141,120.1 HNorth.41@140.65,120.45
HEADERS.HN42: FPGA.P17 HNorth.50 | length 43.6
  Top Layer w0.254: FPGA.P17@128.568,88.804 v1(128.968,89.204)
  Layer3 w0.1: v1(128.968,89.204) 128.55,89.622 128.55,90.725 138.825,101
  Layer3 w0.254: 138.825,101 138.85,101 149.475,111.625 149.475,121.475 HNorth.50@150.825,122.825
  Layer4 w0.1: v1@128.946,89.204 v1(128.968,89.204)
HEADERS.HN43: FPGA.P18 HNorth.45 | length 37.9
  Top Layer w0.254: FPGA.P18@128.568,89.604 v1(128.968,90.004)
  Layer2 w0.1: v1(128.968,90.004) 128.968,90.743 135.3,97.075
  Layer2 w0.254: 135.3,97.075 135.3,101.3 145.925,111.925 HNorth.45@145.925,120.325
HEADERS.HN44: FPGA.N15 HNorth.39 | length 37.6
  Top Layer w0.254: FPGA.N15@127.768,87.204 v1(128.168,87.604)
  Layer5 w0.1: v1(128.168,87.604) 127.8,87.972 127.8,91.227 132.3,95.727 132.3,96.675
  Layer5 w0.254: 132.3,96.675 138.05,102.425 HNorth.39@138.05,120.275
HEADERS.HN45: FPGA.N16 HNorth.47 | length 42.4
  Top Layer w0.254: FPGA.N16@127.768,88.004 v1(128.168,88.404)
  Layer5 w0.1: v1(128.168,88.404) 128.575,88.811 129.261,88.811 129.35,88.9 129.35,90.45 130.975,92.075
  Layer5 w0.254: 130.975,92.075 132.675,92.075 148.481,107.881 148.481,120.294 HNorth.47@148.375,120.4
HEADERS.HN46: FPGA.T17 HNorth.55 | length 47.2
  Top Layer w0.254: FPGA.T17@130.168,88.804 v1(130.568,89.204)
  Layer4 w0.1: v1(130.568,89.204) 131,89.636 131,90.725
  Layer4 w0.254: 131,90.725 135.5,95.225 135.5,103.75 141,109.25 147.5,109.25 158.375,120.125 158.375,120.4 HNorth.55@158.325,120.45
HEADERS.HN47: FPGA.T18 HNorth.49 | length 39.4
  Top Layer w0.254: FPGA.T18@130.168,89.604 v1(130.568,90.004)
  Layer2 w0.1: v1(130.568,90.004) 130.568,90.618
  Layer2 w0.254: 130.568,90.618 130.568,91.568 150.9,111.9 HNorth.49@150.9,120.4
HEADERS.HN48: FPGA.U17 HNorth.57 | length 48.1
  Top Layer w0.254: FPGA.U17@130.968,88.804 v1(131.368,89.204)
  Layer4 w0.1: v1@131.375,89.225 131.725,89.575 131.725,90.3 132.575,91.15
  Layer4 w0.254: 132.575,91.15 136.567,95.142 136.585,95.142 137.5,96.057 137.5,103 142.5,108 149.75,108 161.1,119.35 161.1,119.625 161.075,119.65 HNorth.57@161.075,120.175
HEADERS.HN49: FPGA.U18 HNorth.51 | length 41
  Top Layer w0.254: FPGA.U18@130.968,89.604 v1(131.368,90.004)
  Layer5 w0.254: v1(131.368,90.004) 131.368,90.3 131.836,90.768 133.418,90.768 153.55,110.9 HNorth.51@153.55,120.35
HEADERS.HN50: FPGA.M14 HNorth.48 | length 50.4
  Top Layer w0.254: FPGA.M14@126.968,86.404 v1(127.368,86.804)
  Layer4 w0.1: v1(127.368,86.804) 126.95,87.222 126.95,87.875 127.05,87.975 128.475,87.975 128.575,88.075 128.575,90.85 129.9,92.175
  Layer4 w0.254: 129.9,92.175 129.9,107.9 136.75,114.75 143.675,114.75 147.05,118.125 147.05,121.225 HNorth.48@148.475,122.65
HEADERS.HN51: FPGA.N14 HNorth.54 | length 48.7
  Top Layer w0.254: FPGA.N14@127.768,86.404 v1(128.168,86.804)
  Layer3 w0.1: v1(128.168,86.804) 128.564,87.2 129.175,87.2 129.35,87.375 129.35,87.85 129.5,88 130,88 130.175,88.175 130.175,90.55 130.725,91.1
  Layer3 w0.254: 130.725,91.1 139.125,99.5 139.125,99.675 154.675,115.225 154.675,121.3 HNorth.54@156.1,122.725
HEADERS.HN52: FPGA.L14 HNorth.46 | length 45.1
  Top Layer w0.254: FPGA.L14@126.168,86.404 v1(126.568,86.804)
  Layer3 w0.1: v1(126.568,86.804) 126.975,87.211 126.975,87.95 127.05,88.025 127.65,88.025 127.8,88.175 127.8,91.227 128.15,91.577
  Layer3 w0.254: 128.15,91.577 128.15,92.4 144.6,108.85 144.6,121.575 HNorth.46@145.95,122.925
HEADERS.HN53: FPGA.M13 HNorth.35 | length 38.7
  Top Layer w0.254: FPGA.M13@126.968,85.604 v1(127.368,86.004)
  Layer5 w0.1: 127.2,91.475 127.2,91.45 127.2,90.85 126.975,90.625 126.975,86.397 v1(127.368,86.004)
  Layer5 w0.254: 127.2,91.45 130.925,95.175 130.925,99.375 134.25,102.7 134.25,119 133.056,120.194 HNorth.35@133.056,120.396